# EAGLE board avr_lag1 (EAGLE 5.07)
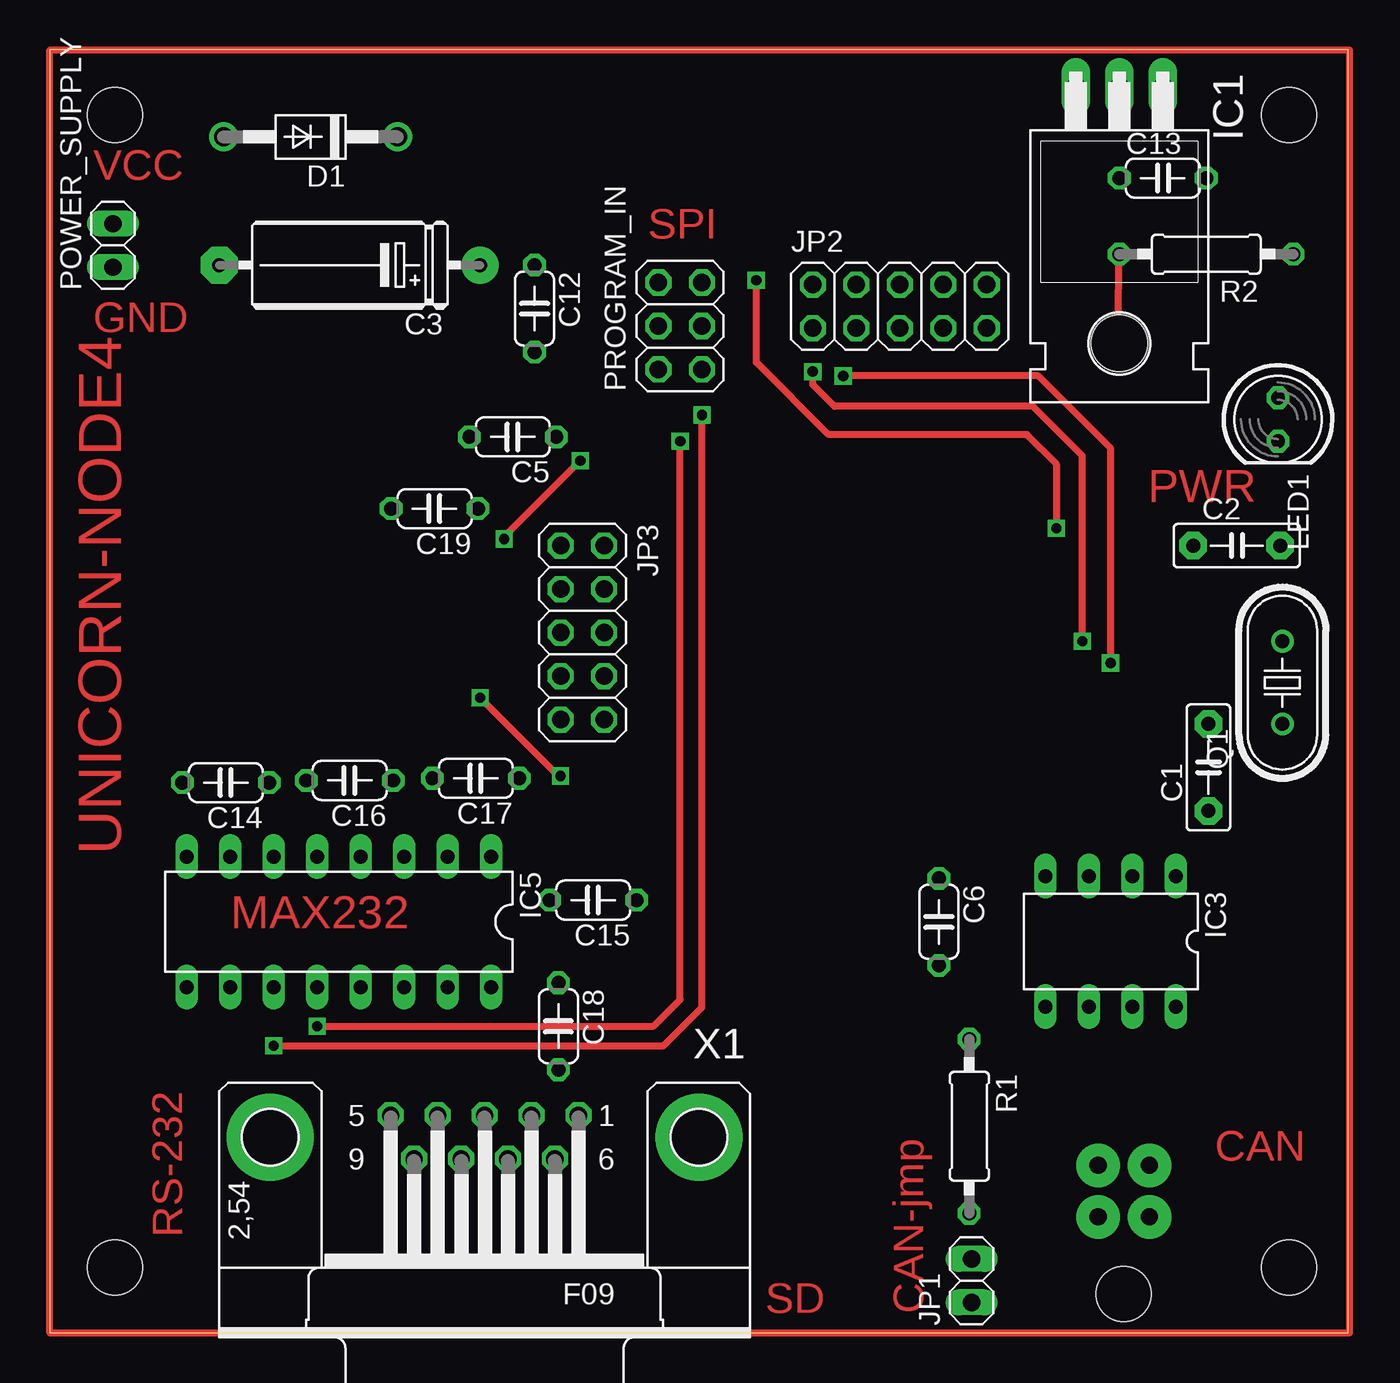
[diagram p0: board, top side]
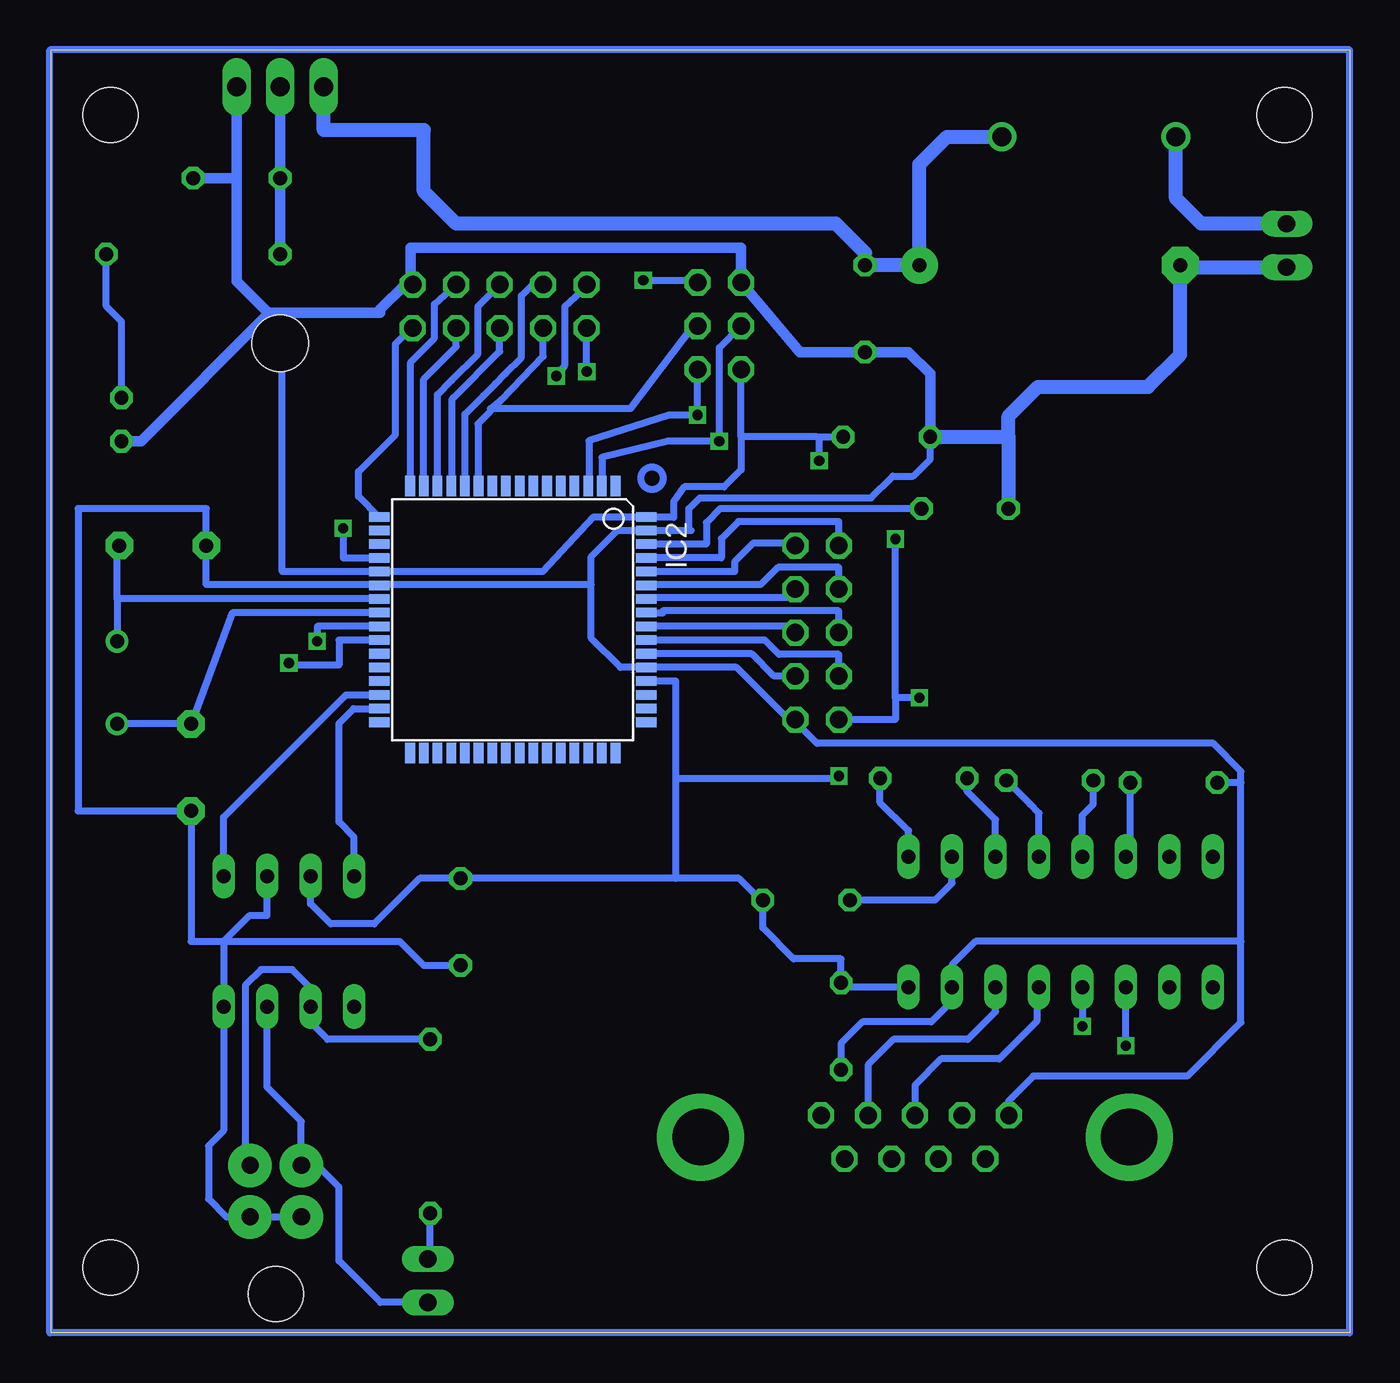
[diagram p1: board, bottom side, seen from below]

Size 75.87 x 74.92 mm. Coordinates in mm from the lower left corner, seen from the top.
Outline: 0,0 75.87,0 75.87,74.92 0,74.92 0,0
Copper layers (1*16): Top 0.035mm / dielectric 1.5mm / Bottom 0.035mm
Design rules "default": minimum track width 10mil, minimum drill 24mil, track to track 8mil, track to pad 8mil, pad to pad 8mil, via to via 8mil, smd to smd 8mil, copper to edge 40mil, drill to drill 8mil, minimum pad ring 10mil, minimum via ring 8mil, stop-mask expansion 4mil, vias tented up to drill 0mil, thermal gap 10mil
Holes 3.2 mm at 3.81,3.81 3.81,71.12 72.39,71.12 72.39,3.81

## Footprints (pad centres in the part's own frame; a part is rotated, then mirrored left to right if it is on the bottom)
C5B2.5 = drill 0.813 pad 1.6 octagon: 1 -2.54,0; 2 2.54,0
E15-5 = drill 0.813 pad 2.159 round: + -7.62,0 | drill 0.813 pad 2.159 octagon: - 7.62,0
C050-024X044 = drill 0.813 octagon: 1 -2.54,0; 2 2.54,0
DO41-10 = drill 1.118 round: A 5.08,0; C -5.08,0
TO220H = drill 1.118 long: 1 -2.54,-10.16; 2 0,-10.16; 3 2.54,-10.16 | hole 3.302: 0,4.826
TQFP64 = smd 1.194 x 0.559: 1 -7.8,6; 2 -7.8,5.2; 3 -7.8,4.4; 4 -7.8,3.6; 5 -7.8,2.8; 6 -7.8,2; 7 -7.8,1.2; 8 -7.8,0.4; 9 -7.8,-0.4; 10 -7.8,-1.2; 11 -7.8,-2; 12 -7.8,-2.8; 13 -7.8,-3.6; 14 -7.8,-4.4; 15 -7.8,-5.2; 16 -7.8,-6; 33 7.8,-6; 34 7.8,-5.2; 35 7.8,-4.4; 36 7.8,-3.6; 37 7.8,-2.8; 38 7.8,-2; 39 7.8,-1.2; 40 7.8,-0.4; 41 7.8,0.4; 42 7.8,1.2; 43 7.8,2; 44 7.8,2.8; 45 7.8,3.6; 46 7.8,4.4; 47 7.8,5.2; 48 7.8,6 | smd 0.559 x 1.194: 17 -6,-7.8; 18 -5.2,-7.8; 19 -4.4,-7.8; 20 -3.6,-7.8; 21 -2.8,-7.8; 22 -2,-7.8; 23 -1.2,-7.8; 24 -0.4,-7.8; 25 0.4,-7.8; 26 1.2,-7.8; 27 2,-7.8; 28 2.8,-7.8; 29 3.6,-7.8; 30 4.4,-7.8; 31 5.2,-7.8; 32 6,-7.8; 49 6,7.8; 50 5.2,7.8; 51 4.4,7.8; 52 3.6,7.8; 53 2.8,7.8; 54 2,7.8; 55 1.2,7.8; 56 0.4,7.8; 57 -0.4,7.8; 58 -1.2,7.8; 59 -2,7.8; 60 -2.8,7.8; 61 -3.6,7.8; 62 -4.4,7.8; 63 -5.2,7.8; 64 -6,7.8
DIL08 = drill 0.813 long: 1 -3.81,-3.81; 2 -1.27,-3.81; 3 1.27,-3.81; 4 3.81,-3.81; 5 3.81,3.81; 6 1.27,3.81; 7 -1.27,3.81; 8 -3.81,3.81
DIL16 = drill 0.813 long: 1 -8.89,-3.81; 2 -6.35,-3.81; 3 -3.81,-3.81; 4 -1.27,-3.81; 5 1.27,-3.81; 6 3.81,-3.81; 7 6.35,-3.81; 8 8.89,-3.81; 9 8.89,3.81; 10 6.35,3.81; 11 3.81,3.81; 12 1.27,3.81; 13 -1.27,3.81; 14 -3.81,3.81; 15 -6.35,3.81; 16 -8.89,3.81
1X02 = drill 1.016 long: 1 -1.27,0; 2 1.27,0
2X05 = drill 1.016 octagon: 1 -5.08,-1.27; 2 -5.08,1.27; 3 -2.54,-1.27; 4 -2.54,1.27; 5 0,-1.27; 6 0,1.27; 7 2.54,-1.27; 8 2.54,1.27; 9 5.08,-1.27; 10 5.08,1.27
LED5MM = drill 0.813 octagon: A -1.27,0; K 1.27,0
2X03 = drill 1.016 octagon: 1 -2.54,-1.27; 2 -2.54,1.27; 3 0,-1.27; 4 0,1.27; 5 2.54,-1.27; 6 2.54,1.27
HC49U70 = drill 0.813 round: 1 -2.413,0; 2 2.413,0
0207/10 = drill 0.813 octagon: 1 -5.08,0; 2 5.08,0
MICROFIT4SOCK = drill 1 pad 2.54 round: PIN1 -2,0; PIN2 1,0; PIN3 -2,-3; PIN4 1,-3 | hole 3.2: -0.5,-7.5
F09HP = drill 1.016 octagon: 1 -5.486,-1.27; 2 -2.743,-1.27; 3 0,-1.27; 4 2.743,-1.27; 5 5.486,-1.27; 6 -4.115,1.27; 7 -1.372,1.27; 8 1.372,1.27; 9 4.115,1.27 | drill 3.302 pad 5.08 round: G1 -12.522,0; G2 12.522,0

## Placement (x,y rotation side)
C1  22pF  [C5B2.5]  67.69,33.02 90 top
C2  22pF  [C5B2.5]  69.34,45.97 0 top
C3  330uF  [E15-5]  17.53,62.36 180 top
C5  100nF  [C050-024X044]  27.05,52.32 180 top
C6  100nF  [C050-024X044]  51.94,24 270 top
C12  100nF  [C050-024X044]  28.32,59.82 270 top
C13  100nF  [C050-024X044]  65.02,67.44 0 top
C14  100nF  [C050-024X044]  10.29,32.13 180 top
C15  100nF  [C050-024X044]  31.75,25.27 180 top
C16  100nF  [C050-024X044]  17.53,32.26 180 top
C17  100nF  [C050-024X044]  24.89,32.38 180 top
C18  100nF  [C050-024X044]  29.72,17.91 270 top
C19  100nF  [C050-024X044]  22.48,48.13 180 top
D1  1N4004  [DO41-10]  15.24,69.85 180 top
IC1  317T  [TO220H]  62.48,62.61 180 top
IC2  MEGA128-A  [TQFP64]  48.9,41.66 270 bottom
IC3  PCA82C250  [DIL08]  61.98,22.86 180 top
IC5  MAX232  [DIL16]  16.89,24 180 top
JP1  [1X02]  53.85,3.05 90 top
JP2  [2X05]  49.66,59.94 0 top
JP3  [2X05]  31.11,40.89 270 top
LED1  [LED5MM]  71.75,53.34 270 top
POWER_SUPPLY  [1X02]  3.68,63.5 90 top
PROGRAM_IN  [2X03]  36.83,58.8 90 top
Q1  18.4320 MHz  [HC49U70]  72.01,37.97 90 top
R1  120  [0207/10]  53.72,12.06 270 top
R2  250  [0207/10]  67.56,62.99 180 top
U$1  MICROFIT4  [MICROFIT4SOCK]  63.25,9.78 0 top
X1  [F09HP]  25.4,11.43 180 top

## Library data of the parts
C1 C2 = capacitor-wima
C3 C5 C6 C12-C19 = rcl
D1 = diode
IC1 = linear
IC2 = atmel
IC3 = micro-philips
IC5 = maxim
JP1-JP3 POWER_SUPPLY PROGRAM_IN = pinhead
LED1 = led
Q1 = crystal
R1 R2 = resistor
U$1 = UNICORN
X1 = con-subd

## Nets
+5V: C5.1 C6.1 C13.1 C15.1 C18.1 IC1.2 IC2.21 IC2.52 IC2.64 IC3.3 IC5.16 JP3.9 PROGRAM_IN.2 R2.2
ADC0_PF0: IC2.61 JP3.1
ADC1_PF1: IC2.60 JP3.2
ADC2_PF2: IC2.59 JP3.3
ADC3_PF3: IC2.58 JP3.4
ADC4_PF4: IC2.57 JP3.5
ADC5_PF5: IC2.56 JP3.6
ADC6_PF6: IC2.55 JP3.7
ADC7_PF7: IC2.54 JP3.8
CANJUMP1: IC3.7 JP1.1 U$1.PIN1
CANJUMP2: JP1.2 R1.2
MISO/TXD0: IC2.3 IC5.11 PROGRAM_IN.1
MOSI/RXD0: IC2.2 IC5.12 PROGRAM_IN.4
N$1: C1.2 IC2.24 Q1.1
N$2: C2.2 IC2.23 Q1.2
N$3: C1.1 C2.1 C3.- C5.2 C6.2 C12.2 C13.2 C14.2 C18.2 C19.2 IC1.1 IC2.22 IC2.53 IC2.63 IC3.2 IC3.8 IC5.15 JP2.10 JP3.10 LED1.K POWER_SUPPLY.1 PROGRAM_IN.6 U$1.PIN3 U$1.PIN4 X1.5
N$5: D1.A POWER_SUPPLY.2
N$6: LED1.A R2.1
N$10: C19.1 IC2.62
N$21: IC5.13 X1.3
N$33: IC5.14 X1.2
N$35: C17.1 IC5.1
N$36: C17.2 IC5.3
N$37: C16.1 IC5.4
N$38: C16.2 IC5.5
N$39: C14.1 IC5.6
N$41: C15.2 IC5.2
N$51: IC3.6 R1.1 U$1.PIN2
PB2: IC2.12 JP2.4
PB3: IC2.13 JP2.5
PB4: IC2.14 JP2.6
PB5: IC2.15 JP2.7
PB6: IC2.16 JP2.8
PE2: IC2.4
PE3: IC2.5
PE4: IC2.6
PE5: IC2.7
PE6: IC2.8
PE7: IC2.9
PWM: IC2.17 JP2.9
RESET: IC2.20 PROGRAM_IN.5
RXCAN: IC2.31 IC3.4
SCK: IC2.11 JP2.3 PROGRAM_IN.3
SCL: IC2.25 JP2.1
SDA: IC2.26 JP2.2
TXCAN: IC2.30 IC3.1
VCC: C3.+ C12.1 D1.C IC1.3

## Tracks (layer width: path | path; a pad name or v marks a point on that pad's centre or on a via)
+5V  (via drill 0.6)
  Top 0.406: v26.54,46.35 26.54,46.48 v30.99,50.93 | v29.84,32.51 29.72,32.51 v25.15,37.08 | v62.36,57.53 R2.2
  Bottom 0.406: 31.11,52.32 35.56,52.32 | 31.11,52.32 C5.1 | 35.56,52.32 PROGRAM_IN.2 | 35.56,52.32 35.56,50.4 36.55,49.4 38.89,49.4 39.5,48.54 39.5,47.62 40.97,47.62 | 40.97,47.62 41.09,47.62 | 41.09,47.62 IC2.64 40.97,47.62 | IC5.16 29.72,20.19 C18.1 29.72,21.84 32.48,21.84 34.29,23.65 C15.1 34.29,25.4 34.54,25.4 35.69,26.54 39.37,26.54 | IC2.21 47.14,44.45 44.22,47.62 41.09,47.62 | IC3.3 60.71,25.05 59.53,23.88 56.99,23.88 54.33,26.54 C6.1 39.37,26.54 | JP3.9 26.54,35.81 26.54,37.08 | 26.54,37.08 v26.54,46.35 | v30.99,50.93 30.99,52.2 31.11,52.32 | 39.37,26.54 39.37,32.38 | IC2.52 39.37,38.06 39.37,32.38 | 39.37,32.38 29.84,32.38 v29.84,32.51 | v25.15,37.08 26.54,37.08 | v62.36,57.53 62.36,44.45 IC2.21 | IC2.21
  Bottom 0.61: IC1.2 C13.1 R2.2
ADC0_PF0
  Bottom 0.406: IC2.61 36.7,45.26 36.7,46.38 35.71,47.37 29.84,47.37 JP3.1
ADC1_PF1
  Bottom 0.406: IC2.60 35.94,44.46 35.94,45.02 34.86,46.1 32.38,46.1 JP3.2
ADC2_PF2
  Bottom 0.406: IC2.59 40.64,43.66 40.64,43.69 34.42,43.69 33.4,44.7 29.84,44.7 JP3.3
ADC3_PF3
  Bottom 0.406: 32.51,43.43 JP3.4 32.38,42.93 41.09,42.93 IC2.58
ADC4_PF4
  Bottom 0.406: JP3.5 29.84,42.16 40.13,42.16 40.13,42.04 41.09,42.04 IC2.57
ADC5_PF5
  Bottom 0.406: IC2.56 32.38,41.26 JP3.6
ADC6_PF6
  Bottom 0.406: IC2.55 34.16,40.46 33.33,39.62 29.84,39.62 JP3.7
ADC7_PF7
  Bottom 0.406: IC2.54 34.92,39.66 33.62,38.35 JP3.8
CANJUMP1
  Bottom 0.406: IC3.7 63.25,14.35 61.25,12.35 U$1.PIN1 60.33,9.78 59.05,8.51 59.05,4.2 56.63,1.78 JP1.1
CANJUMP2
  Bottom 0.406: JP1.2 53.72,4.32 R1.2
MISO/TXD0  (via drill 0.6)
  Top 0.406: v13.08,16.76 35.85,16.76 38.1,19.01 v38.1,53.59
  Bottom 0.406: IC2.3 44.45,49.46 44.45,52.09 39.77,53.59 v38.1,53.59 PROGRAM_IN.1 | v13.08,16.76 IC5.11
MOSI/RXD0  (via drill 0.6)
  Top 0.406: v15.62,17.91 35.28,17.91 36.83,19.46 v36.83,52.07
  Bottom 0.406: IC2.2 43.69,49.46 43.69,51.13 39.83,52.07 v36.83,52.07 36.83,57.53 PROGRAM_IN.4 | IC5.12 v15.62,17.91
N$1
  Bottom 0.406: 56.7,42.04 IC2.24 61.2,42.06 65.28,42.05 C1.2 Q1.1
N$2
  Bottom 0.406: C2.2 72.01,45.97 72.01,42.93 72.01,42.86 | 72.01,42.86 Q1.2 | IC2.23 72.01,42.86
N$3
  Bottom 0.406: PROGRAM_IN.6 35.69,61.34 | 56.64,59.77 56.64,59.56 | 55.19,61.21 54.86,61.21 JP2.10 | IC1.1 65.41,72.77 | IC2.63 38.61,46.86 | 38.61,46.86 38.48,46.86 | C3.- 9.91,62.23 | 19.94,12.7 X1.5 | C18.2 29.72,16.9 28.46,18.16 24.45,18.16 23.37,19.24 23.37,20.19 IC5.15 23.24,21.49 21.87,22.86 6.35,22.86 | 6.35,32.13 C14.2 | 6.35,22.86 6.35,32.13 | 19.94,12.7 20.07,12.7 | 19.94,12.7 19.94,13.54 18.49,14.99 9.49,14.99 6.35,18.13 6.35,22.86 | 6.35,32.13 6.35,32.79 7.98,34.42 31.11,34.42 32.38,35.69 JP3.10 32.77,35.81 35.81,38.86 IC2.53 42.61,38.86 44.32,40.57 44.32,43.69 | IC3.2 63.25,24.38 64.26,24.38 65.79,22.86 | 56.7,43.69 IC2.22 | 44.32,43.69 56.7,43.69 | 44.32,43.69 44.32,45.31 42.77,46.86 IC2.63 | IC2.63 | C6.2 54.1,21.46 55.5,22.86 65.79,22.86 | 65.79,22.86 IC3.8 65.79,11.81 66.67,10.92 66.67,7.82 65.63,6.78 U$1.PIN4 U$1.PIN3 | 63.31,59.69 63.12,59.69 63.12,59.56 | 38.61,46.86 38.61,48.13 37.97,48.77 27.96,48.77 26.69,50.04 25.5,50.04 24.51,51.03 C5.2 | 65.79,22.86 67.69,22.86 C1.1 74.3,30.48 74.3,48.13 66.8,48.13 C2.1 66.8,43.69 56.7,43.69
  Bottom 0.61: 56.64,59.56 63.12,59.56 70.61,52.07 LED1.K | 55.19,61.21 56.64,59.77 | 65.02,67.44 C13.2 | 65.02,67.44 IC1.1 | C5.2 24.51,56.01 25.78,57.28 C12.2 32.13,57.28 PROGRAM_IN.6 35.56,63.37 54.86,63.37 54.86,61.21 | 63.31,59.69 65.02,61.4 65.02,67.44
  Bottom 0.813: C5.2 19.94,52.32 | 19.94,52.32 19.94,53.52 18.21,55.24 11.78,55.24 9.91,57.12 C3.- | 19.94,52.32 C19.2 | 9.91,62.23 POWER_SUPPLY.1
N$5
  Bottom 0.813: POWER_SUPPLY.2 8.68,64.77 10.16,66.25 D1.A
N$6
  Bottom 0.406: R2.1 72.64,59.94 71.75,59.05 LED1.A
N$9
  Top 0.406: 0,74.93 75.95,74.93 75.95,0 75.82,0 0,0 0,74.93
N$10
  Bottom 0.406: IC2.62 37.59,46.06 37.59,47.32 36.78,48.13 C19.1
N$11
  Bottom 0.406: 0,74.93 75.95,74.93 75.95,0.13 75.95,0 0,0 0,74.93
N$21
  Bottom 0.406: IC5.13 18.29,20.19 18.29,18.19 20.47,16 23.87,16 25.4,14.47 X1.3
N$33
  Bottom 0.406: IC5.14 20.7,18.76 22.32,17.14 26.65,17.14 28.14,15.65 X1.2
N$35
  Bottom 0.406: IC5.1 25.78,29.34 25.81,29.34 27.43,30.96 C17.1
N$36
  Bottom 0.406: C17.2 22.35,31.62 20.7,29.97 IC5.3
N$37
  Bottom 0.406: C16.1 18.67,30.86 18.16,30.35 IC5.4
N$38
  Bottom 0.406: C16.2 14.99,30.86 15.62,30.23 IC5.5
N$39
  Bottom 0.406: IC5.6 12.83,27.81 C14.1
N$41
  Bottom 0.406: IC5.2 23.24,26.27 24.23,25.27 C15.2
N$51
  Bottom 0.406: R1.1 59.71,17.14 60.71,18.14 IC3.6 60.71,20.13 61.78,21.21 63.6,21.21 64.52,20.29 64.52,9.78 U$1.PIN2
PB2
  Bottom 0.406: JP2.4 47.75,61.21 48.39,60.58 48.39,56.95 49.33,56.01 49.91,55.43 50.6,54.74 51.69,53.65 IC2.12
PB3
  Bottom 0.406: IC2.13 52.45,49.46 52.45,54.48 52.36,54.61 49.66,57.31 JP2.5
PB4
  Bottom 0.406: JP2.6 50.93,59.94 50.93,57.16 52.46,55.63 53.3,54.79 IC2.14
PB5
  Bottom 0.406: JP2.7 52.2,57.59 53.27,56.52 54.09,55.7 IC2.15
PB6
  Bottom 0.406: IC2.16 54.86,49.46 54.86,56.69 53.47,58.09 53.47,60.07 JP2.8
PE2
  Bottom 0.406: IC2.4 45.34,49.46
PWM
  Bottom 0.406: JP2.9 54.84,58.67 55.75,57.76 55.75,52.45 57.91,50.29 57.91,48.84 56.7,47.62 IC2.17
RESET  (via drill 0.6)
  Top 0.406: v58.8,46.99 58.8,50.74 57.09,52.45 45.5,52.45 41.27,56.68 v41.27,61.47
  Bottom 0.406: 38.22,61.34 PROGRAM_IN.5 38.1,61.47 v41.27,61.47 | IC2.20 58.8,45.26 v58.8,46.99
RXCAN
  Bottom 0.406: IC2.31 58.2,36.46 59.05,35.6 59.05,29.84 58.17,28.96 IC3.4
SCK
  Bottom 0.406: IC2.11 50.93,49.46 50.93,53.09 49.56,54.5 | 49.56,54.5 47.12,57.02 JP2.3 | PROGRAM_IN.3 38.33,58.8 42.01,53.98 50.19,53.98 49.56,54.5
SCL  (via drill 0.6)
  Top 0.406: v60.33,40.39 60.33,51.22 57.45,54.1 45.85,54.1 44.58,55.37 v44.58,56.13
  Bottom 0.406: v44.58,56.13 JP2.1 | IC2.25 60.33,41.26 v60.33,40.39
SDA  (via drill 0.6)
  Top 0.406: v61.98,39.12 61.98,51.66 57.75,55.88 v46.35,55.88
  Bottom 0.406: v46.35,55.88 45.85,56.52 45.85,59.94 44.58,61.09 JP2.2 | IC2.26 59.05,40.46 59.05,38.99 61.98,38.99 v61.98,39.12
TXCAN
  Bottom 0.406: IC3.1 65.79,30.11 58.64,37.26 IC2.30
VCC
  Bottom 0.813: IC1.3 59.94,70.23 54.1,70.23 54.1,66.67 52.2,64.77 30.02,64.77 28.32,63.07 C12.1 C3.+ 25.15,68.23 23.53,69.85 D1.C
(copper drawn outside any net)
  shapes: Bottom circle x6, Top circle x5

## Text on the board
Top: VCC | SPI | GND | PWR | UNICORN-NODE4 | MAX232 | CAN | RS-232 | SD | CAN-jmp